# Altium PCB Arduino MEGA blank shield.pcbdoc
Units mil, origin at the board's own origin, x right, y up, seen from the top; angles counter-clockwise.
Board outline 3996.06 x 2106.3 mil, 2 copper layers (Top Layer, Bottom Layer), stack 62.8 mil thick; 29 components, 31 nets, 149 pads, 0 vias.
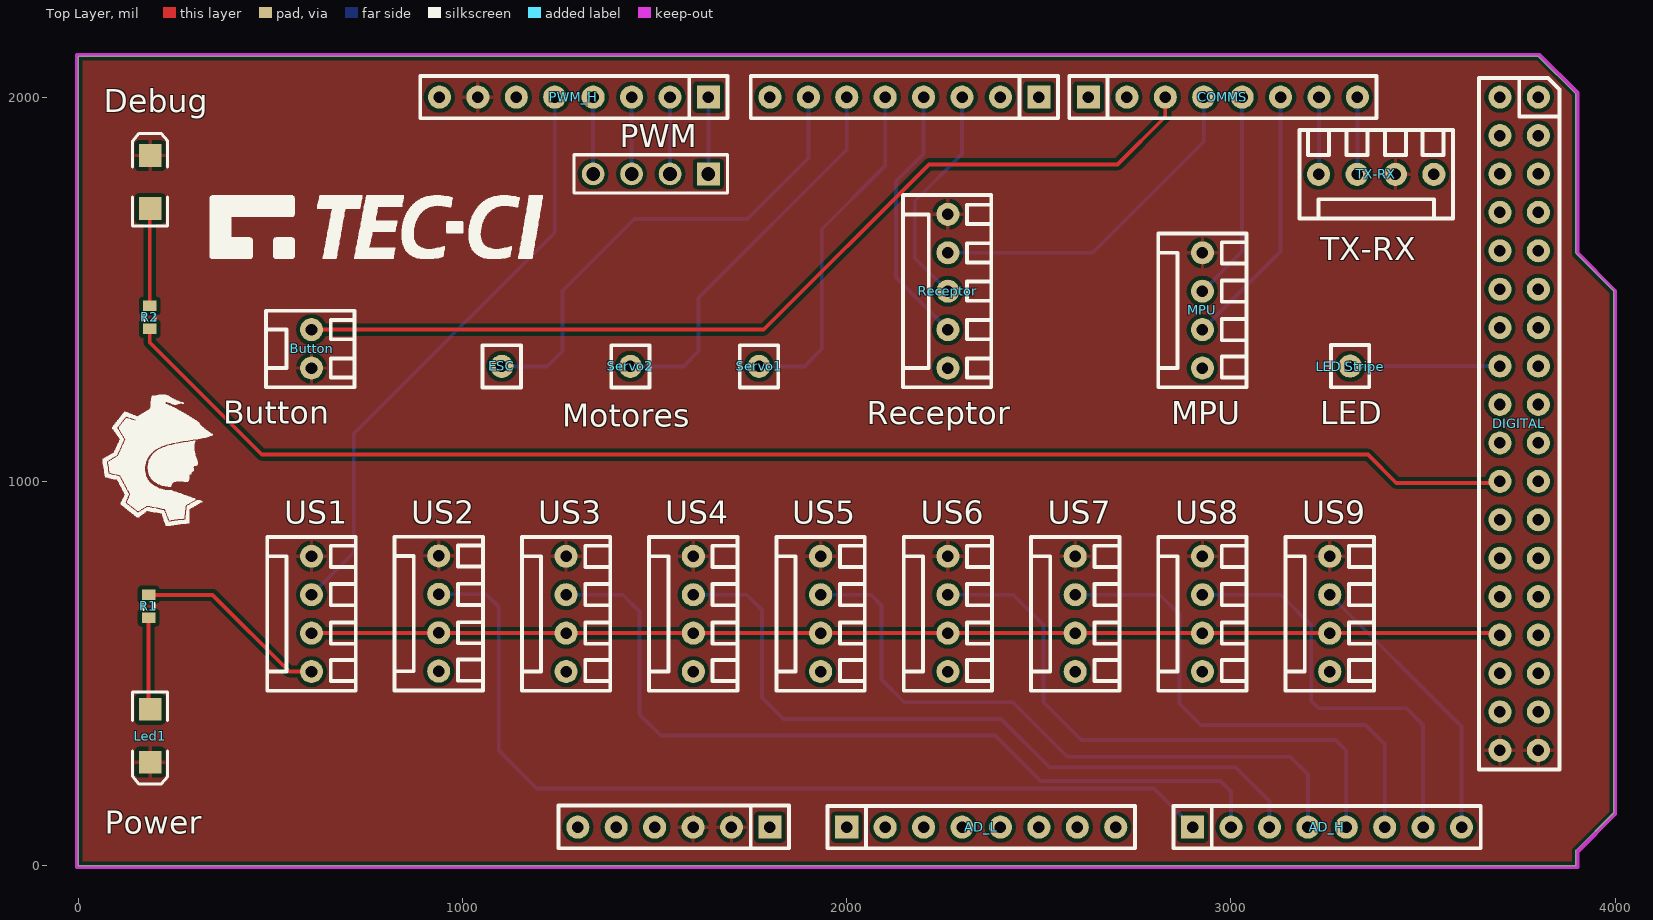
[diagram p0: Top Layer view]
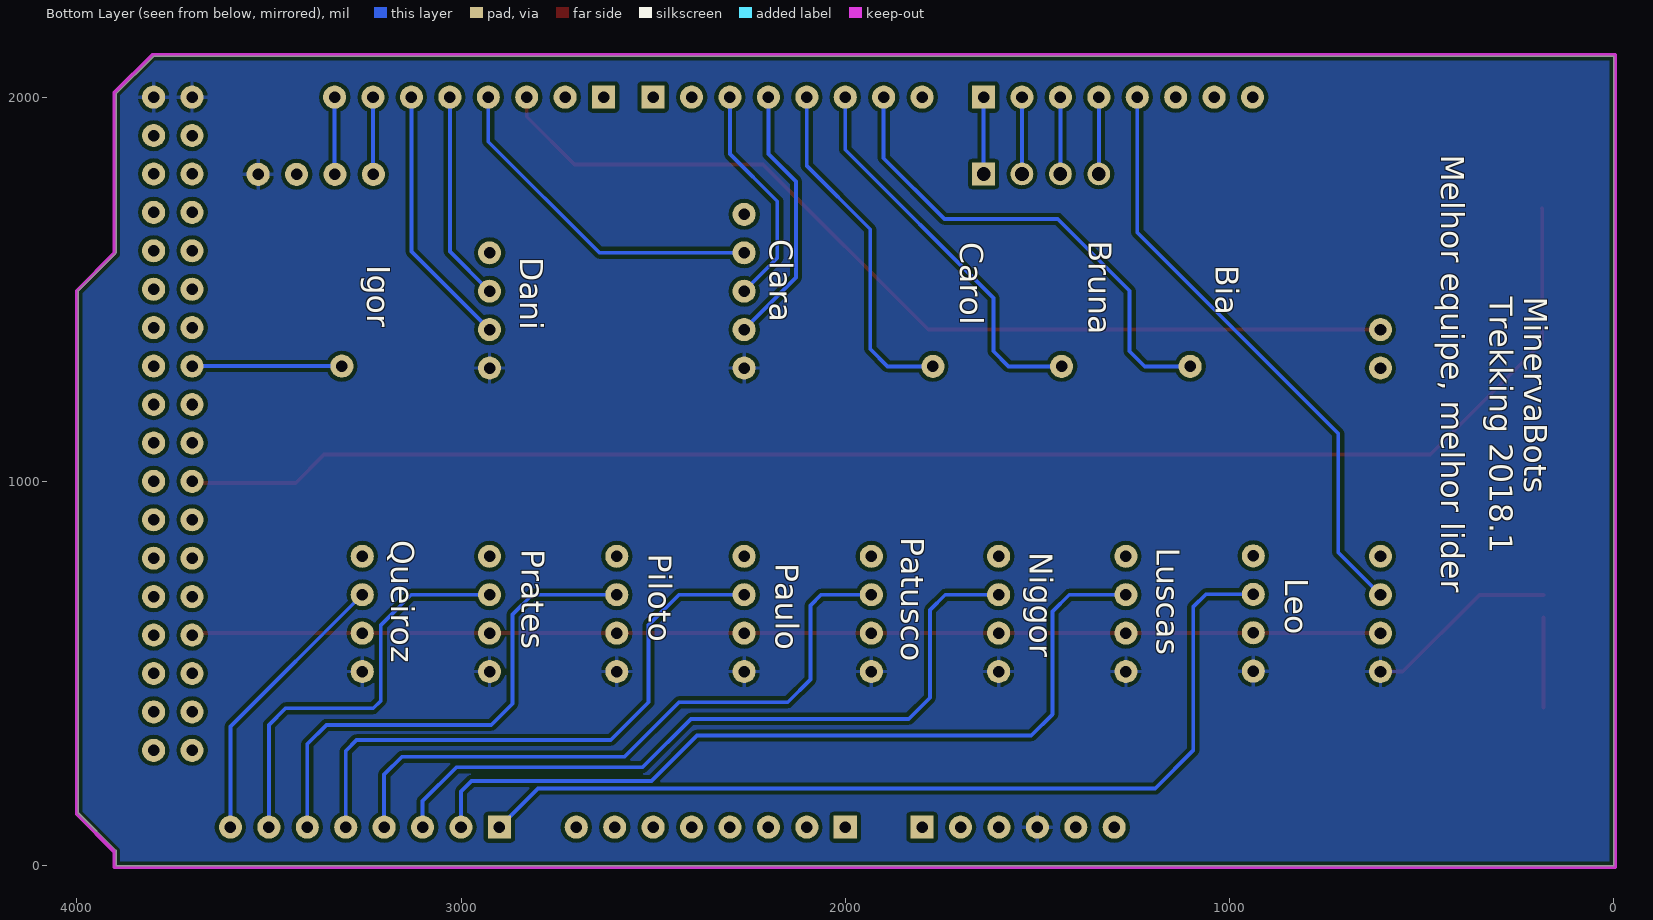
[diagram p1: Bottom Layer view, seen from below]

## Layer stack, top to bottom
Top Solder: solder mask 1, Solder Resist, Dk 3.5
Top Layer: signal copper 1.4
Dielectric1: dielectric 60, FR-4, Dk 4.8
Bottom Layer: signal copper 1.4
Bottom Solder: solder mask 1, Solder Resist, Dk 3.5

## Board outline
0,0 0,2106.3 3799.21,2106.3 3897.64,2007.87 3897.64,1594.49 3996.06,1496.06 3996.06,137.8 3897.64,39.37 3897.64,0

## Design rules (kind name [scope] priority, off if disabled: settings)
Clearance [All] p1: gap=10 ignorepadtopadclearanceinfootprint=FALSE except(0: Arc-Hole Track-Hole SMDPad-Hole THPad-Hole Via-Hole Fill-Hole Poly-Hole Region-Hole Text-Hole)
PolygonConnect [All] p1: connectstyle=Relief reliefconductorwidth=10 reliefentries=4 polygonreliefangle="90 Angle" airgapwidth=10
RoutingVias [All] p1: holewidth=28 width=50 viastyle="Through Hole" minholewidth=28 minwidth=50 maxholewidth=28 maxwidth=50
SilkToSolderMaskClearance SilkscreenOverComponentPads [IsPad] p1: minsilkscreentomaskgap=10 clearancetoexposedcopper=TRUE
SolderMaskExpansion [All] p1: expansion=4
Width [All] p1: maxlimit=10 minlimit=10 preferedwidth=10
29 further rules are at their usual default settings.

## Components (designator, comment, footprint, x,y, rotation, side; value= is the part's Value field where it differs from the comment)
AD_H "AD_H" "Header 8x1 8.5mm" 2900,100 r0 top locked
AD_L "AD_L" "Header 8x1 8.5mm" 2000,100 r0 top locked
Button "Botão" KK2 607,1294.88 r90 top
COMMS "Communication" "Header 8x1 8.5mm" 2629,2000 r0 top
Debug "LED debug" 3.2X1.6X1.1 187,1779 r90 top
DIGITAL "IO_36" "HEADER 36X 8MM" 3800,2000 r270 top locked
ESC "Locomotion ESC" "HEADER 1X1 8.5MM" 1102.36,1299.21 r0 top
Led1 "LED power" 3.2X1.6X1.1 187,338 r270 top
"LED Stripe" "*" "HEADER 1X1 8.5MM" 3310,1300 r0 top
Motores "PWM_L" "Header 8x1 8.5mm" 2500,2000 r180 top locked
MPU "MPU" KK4 2925.75,1294.88 r90 top
Power "POWER" "Header 6x1 8.5mm" 1800,100 r180 top locked (schematic designator POWER)
PWM "PWM" HDR1X4 1640,1800 r180 top
PWM_H "PWM_H" "Header 8x1 8.5mm" 1640,2000 r180 top locked
R1 "R1" J1-0603 183,675 r270 top value=330
R2 "R2" J1-0603 186,1427 r90 top value=330
Receptor "*" KK5 2263.25,1294.88 r90 top
Servo1 "Steering Servo Motor" "HEADER 1X1 8.5MM" 1771.65,1299.21 r0 top
Servo2 "Camera Servo Motor" "HEADER 1X1 8.5MM" 1437.01,1299.21 r0 top
TX-RX "TX-RX" KK4 3528,1799 r180 top
US1 "Ultrassom 1" KK4 607,505 r90 top
US2 "Ultrassom 2" KK4 938,506 r90 top
US3 "Ultrassom 3" KK4 1269.5,505 r90 top
US4 "Ultrassom 4" KK4 1600.75,505 r90 top
US5 "Ultrassom 5" KK4 1932,505 r90 top
US6 "Ultrassom 6" KK4 2263.25,505 r90 top
US7 "Ultrassom 7" KK4 2594.5,505 r90 top
US8 "Ultrassom 8" KK4 2925.75,505 r90 top
US9 "Ultrassom 9" KK4 3257,505 r90 top

## Footprints (in the part's own frame and the unit in brackets; to place one, negate y for a bottom-side part, rotate by r counter-clockwise, add the part's x,y. Pads: shape width x height; smd on the part's side, far side on the other; paste and mask are expansions set on the pad)
3.2X1.6X1.1 [mm] "SMT LED; 2 Flat Leads"
  rect 1.5x1.5 smd: 1(-1.75,0) 2(1.75,0)
  silkscreen extent -2.9,-1.15 3.2,1.15
HDR1X4 [mm] "Connector; Header; 4 Position"
  rect 1.5x1.5 hole 0.9: 1(0,0)
  round 1.5 hole 0.9: 2(2.54,0) 3(5.08,0) 4(7.62,0)
  silkscreen extent -1.27,-1.27 8.89,1.27
"HEADER 1X1 8.5MM" [mil] "Stackable 1 pin header"
  round 60 hole 30: 1(0,0)
  silkscreen extent -50,-55 50,55, body extent -50,-57 50,57, height 335
"Header 6x1 8.5mm" [mil] "Stackable 6 pin header"
  rect 60x60 hole 30: 1(0,0)
  round 60 hole 30: 2(100,0) 3(200,0) 4(300,0) 5(400,0) 6(500,0)
  silkscreen extent -50,-56 550,55, body extent -50,-57 550,57, height 128
"Header 8x1 8.5mm" [mil] "Stackable 8 pin header"
  rect 60x60 hole 30: 1(0,0)
  round 60 hole 30: 2(100,0) 3(200,0) 4(300,0) 5(400,0) 6(500,0) 7(600,0) 8(700,0)
  silkscreen extent -50,-55 750,55, body extent -49,-58 750,57, height 128
"HEADER 36X 8MM" [mil] "Stackable 10 pin header"
  round 60 hole 30: 1(0,0) 2(0,-100) 3(100,0) 4(100,-100) 5(200,0) 6(200,-100) 7(300,0) 8(300,-100) 9(400,0) 10(400,-100) 11(500,0) 12(500,-100) 13(600,0) 14(600,-100) 15(700,0) 16(700,-100) 17(800,0) 18(800,-100) 19(900,-100) 20(900,0) 21(1000,0) 22(1000,-100) 23(1100,0) 24(1100,-100) 25(1200,0) 26(1200,-100) 27(1300,0) 28(1300,-100) 29(1400,0) 30(1400,-100) 31(1500,0) 32(1500,-100) 33(1600,0) 34(1600,-100) 35(1700,0) 36(1700,-100)
  silkscreen extent -50,-155 1750,55, body extent -50,-157 1750,57, height 128
J1-0603 [mm] "Chip Resistor, Body 1.6x0.8mm, IPC High Density"
  rect 0.7x0.9 smd: 1(-0.75,0) 2(0.75,0)
  silkscreen extent -0.2,-0.35 0.2,0.35, body extent -0.85,-0.48 0.85,0.48, height 0.9
KK2 [mil] "KK Conector, 2 ways"
  round 60 hole 30: 1(0,0) 2(100,0)
  silkscreen extent -50,-112 149,118, body extent -50,-116 150,114, height 468
KK4 [mil] "KK Conector, 4 ways"
  round 60 hole 30: 1(0,0) 2(100,0) 3(200,0) 4(300,0)
  silkscreen extent -50,-115 350,115, body extent -50,-117 350,113, height 468
KK5 [mil] "KK Conector, 5 ways"
  round 60 hole 30: 1(0,0) 2(100,0) 3(200,0) 4(300,0) 5(400,0)
  silkscreen extent -50,-113 450,117, body extent -50,-117 450,113, height 468

## Part data
AD_H AD_L COMMS Motores PWM_H: Supplier Part Number 1=2698925, Supplier 1=Arrow
  AD_H: Supplier 2=Digi-Key, Supplier 3=Newark, Supplier 4=Arrow, Supplier Part Number 2=SAM1198-08-ND, Supplier Part Number 3=11P8329, Supplier Part Number 4=2698940
  AD_L: Supplier 2=Arrow, Supplier 3=Newark, Supplier 4=Digi-Key, Supplier Part Number 2=2698940, Supplier Part Number 3=11P8329, Supplier Part Number 4=SAM1198-08-ND
  COMMS: Supplier 2=Digi-Key, Supplier 3=Arrow, Supplier Part Number 2=SAM1198-08-ND, Supplier Part Number 3=2698940
  Motores PWM_H: Supplier 2=Arrow, Supplier 3=Digi-Key, Supplier Part Number 2=2698940, Supplier Part Number 3=SAM1198-08-ND
Button: library part KK2, "KK Connector, 2 ways"
Debug Led1: library part LED2, "Typical RED, GREEN, YELLOW, AMBER GaAs LED", LatestRevisionDate=17-Jul-2002, LatestRevisionNote="Re-released for DXP Platform.", PackageDescription="SM LED; 2 Flat Leads", PackageReference=3.2X1.6X1.1, PackageVersion=Feb-2002, Published=8-Jun-2000, Publisher="Altium Limited"
DIGITAL: Supplier Part Number 1=2697470, Supplier 1=Arrow, Supplier 2=Digi-Key, Supplier 3=Arrow, Supplier Part Number 2=SAM1198-36-ND, Supplier Part Number 3=2697486
ESC "LED Stripe" Servo1 Servo2: library part "Male Pin Head 1x1"
MPU US1 US2 US3 US4 US5 US6 US7 US8 US9: library part KK4, "KK Connector, 4 ways"
Power: Supplier Part Number 1=2699075, Supplier 1=Arrow, Supplier 2=Arrow, Supplier 3=Newark, Supplier 4=Digi-Key, Supplier Part Number 2=2699089, Supplier Part Number 3=11P8269, Supplier Part Number 4=SAM1198-06-ND
PWM: library part "Header 4", "Header, 4-Pin", LatestRevisionDate=17-Jul-2002, LatestRevisionNote="Re-released for DXP Platform.", Publisher="Altium Limited"
R1 R2: library part Res3, "Resistor", LatestRevisionDate=29-May-2009, LatestRevisionNote="IPC-7351 Footprint Added.", PackageDescription="Chip Resistor", PackageReference=J1-0603, Published=8-Jun-2000, Publisher="Altium Limited"
Receptor: library part KK5, "KK Connector, 5 ways"
TX-RX: library part Component_1, "KK Connector, 4 ways"

## Nets (pads, with @x,y where several pads share a name; then routed paths per layer and width w, separated by ;. In a path a pad name is that pad's centre, name@x,y a point inside that pad or via, vN(x,y) a via of type N, cw(c..) or ccw(c..) an arc to the next point about the centre after c; other vN are vias at no path point)
5V: DIGITAL.1 DIGITAL.2 MPU.1 Power.4 R1.1 Receptor.1 TX-RX.1 US1.1 US2.1 US3.1 US4.1 US5.1 US6.1 US7.1 US8.1 US9.1 | length 506.6
  Top Layer w10: R1.1 349.47,704.53 549,505 US1.1
AD8: AD_H.1 US2.3 | length 2432.1
  Bottom Layer w10: US2.3 1061.72,706 1094.49,673.23 1094.49,299.21 1193.23,200.47 2799.53,200.47 AD_H.1
AD9: AD_H.2 US3.3 | length 2192.4
  Bottom Layer w10: US3.3 1417.05,705 1460.63,661.42 1460.63,393.7 1515.75,338.58 2385.83,338.58 2503.94,220.47 2972.44,220.47 3000,192.91 AD_H.2
AD10: AD_H.3 US4.3 | length 1930.3
  Bottom Layer w10: US4.3@1579,703 US4.3@1584,698 ; US4.3 1739.88,705 1779.53,665.35 1779.53,437.01 1834.65,381.89 2401.57,381.89 2527.56,255.91 3011.81,255.91 3100,167.72 AD_H.3
AD11: AD_H.4 US5.3 | length 1711.9
  Bottom Layer w10: US5.3 2062.72,705 2090.55,677.17 2090.55,484.25 2149.61,425.2 2433.07,425.2 2574.8,283.46 3153.54,283.46 3200,237.01 AD_H.4
AD12: AD_H.5 US6.3 | length 1521.2
  Bottom Layer w10: US6.3 2432.8,705 2511.81,625.98 2511.81,425.2 2610.24,326.77 3271.65,326.77 3300,298.43 AD_H.5
AD13: AD_H.6 US7.3 | length 1319
  Bottom Layer w10: US7.3 2814.68,705 2866.14,653.54 2866.14,421.26 2921.26,366.14 3350.39,366.14 3400,316.54 AD_H.6
AD14: AD_H.7 US8.3 | length 1096.1
  Bottom Layer w10: US8.3 3129.65,705 3208.66,625.98 3208.66,429.13 3228.35,409.45 3456.69,409.45 3500,366.14 AD_H.7
AD15: AD_H.8 US9.3 | length 747.1
  Bottom Layer w10: US9.3 3600,362 AD_H.8
GND: Button.1 Debug.2 DIGITAL.35 DIGITAL.36 Led1.2 MPU.4 Power.2 Power.3 PWM_H.7 Receptor.5 TX-RX.2 US1.4 US2.4 US3.4 US4.4 US5.4 US6.4 US7.4 US8.4 US9.4
IO35: "LED Stripe.1" DIGITAL.16 | length 390
  Bottom Layer w10: 3310,1300 DIGITAL.16
IO41: DIGITAL.22 R2.1 | length 3703.3
  Top Layer w10: R2.1 186,1361 477.53,1069.47 3356.53,1069.47 3430,996 3696,996 DIGITAL.22
IO49: DIGITAL.30 US1.2 US2.2 US3.2 US4.2 US5.2 US6.2 US7.2 US8.2 US9.2 | length 3095.1
  Top Layer w10: US1.2 US3.2 US4.2 US5.2 US6.2 US7.2 US8.2 US9.2 3695,605 DIGITAL.30
NetDebug_1: Debug.1 R2.2 | length 254
  Top Layer w10: R2.2 186,1709.1 Debug.1
NetLed1_1: Led1.1 R1.2 | length 234.6
  Top Layer w10: Led1.1@183,410.9 R1.2
PWM2: Motores.3 Receptor.3 | length 591.8
  Bottom Layer w10: Receptor.3 2177,1581.13 2177,1729 2300,1852 Motores.3
PWM3: Motores.4 Receptor.2 | length 691
  Bottom Layer w10: Motores.4 2200,1852 2128,1780 2128,1530.13 Receptor.2
PWM4: Motores.5 Servo1.1 | length 906
  Bottom Layer w10: Servo1.1 1889.76,1299.21 1935,1344.45 1935,1656 2100,1821 Motores.5
PWM5: Motores.6 Servo2.1 | length 1014.7
  Bottom Layer w10: Servo2.1 1574.8,1299.21 1614.17,1338.58 1614.17,1477.17 2000,1863 Motores.6
PWM6: ESC.1 Motores.7 | length 1280.4
  Bottom Layer w10: ESC.1 1220.47,1299.21 1259.84,1338.58 1259.84,1496.06 1446.78,1683 1742,1683 1900,1841 Motores.7 Motores.7@1895,1995
PWM8: PWM.1 PWM_H.1 | length 200
  Bottom Layer w10: PWM.1 PWM_H.1
PWM9: PWM.2 PWM_H.2 | length 200
  Bottom Layer w10: PWM.2 PWM_H.2
PWM10: PWM.3 PWM_H.3 | length 200
  Bottom Layer w10: PWM.3 PWM_H.3
PWM11: PWM.4 PWM_H.4 | length 200
  Bottom Layer w10: PWM.4 PWM_H.4
PWM12: PWM_H.5 US1.3 | length 1557.2
  Bottom Layer w10: US1.3 717,815 717,1125 1240,1648 PWM_H.5
RX1: Button.2 COMMS.3 | length 2502.5
  Top Layer w10: Button.2 1783.88,1394.88 2214,1825 2705,1825 2829,1949 COMMS.3
RX2: COMMS.5 MPU.3 | length 547.9
  Bottom Layer w10: MPU.3 3029,1598.13 COMMS.5
RX3: COMMS.7 TX-RX.4 | length 200
  Bottom Layer w10: TX-RX.4@3229,1800 COMMS.7
TX1: COMMS.4 Receptor.4 | length 901.5
  Bottom Layer w10: Receptor.4 2639.88,1594.88 2929,1884 COMMS.4
TX2: COMMS.6 MPU.2 | length 689.3
  Bottom Layer w10: MPU.2 3129,1598.13 COMMS.6
TX3: COMMS.8 TX-RX.3 | length 200
  Bottom Layer w10: TX-RX.3@3329,1800 COMMS.8
pads on no net: AD_L.1 AD_L.2 AD_L.3 AD_L.4 AD_L.5 AD_L.6 AD_L.7 AD_L.8 COMMS.1 COMMS.2 DIGITAL.3 DIGITAL.4 DIGITAL.5 DIGITAL.6 DIGITAL.7 DIGITAL.8 DIGITAL.9 DIGITAL.10 DIGITAL.11 DIGITAL.12 DIGITAL.13 DIGITAL.14 DIGITAL.15 DIGITAL.17 DIGITAL.18 DIGITAL.19 DIGITAL.20 DIGITAL.21 DIGITAL.23 DIGITAL.24 DIGITAL.25 DIGITAL.26 DIGITAL.27 DIGITAL.28 DIGITAL.29 DIGITAL.31 DIGITAL.32 DIGITAL.33 DIGITAL.34 Motores.1 Motores.2 Motores.8 Power.1 Power.5 Power.6 PWM_H.6 PWM_H.8

## Polygon pours and split planes (outlines as drawn)
GND on Top Layer "Top Layer- GND" (solid, remove dead copper, pour order 6): -326.77,2381.89 4685.04,2381.89 4685.04,1767.72 4685.04,1496.06 4685.04,-318.9 -318.9,-318.9 -326.77,-62.99
5V on Bottom Layer "Bottom Layer-5V" (solid, remove dead copper, pour order 10): -169.29,2240.16 -169.29,-161.42 4145.67,-161.42 4145.67,2232.28

## Keep-outs
Keep-Out Layer:
  lines w10: -3.94,-3.94 -3.94,2110.24 3803.15,2110.24 3901.57,2011.81 3901.57,1594.49 4000,1496.06 4000,133.86 3901.57,35.43 3901.57,-3.94 -3.94,-3.94

## Silkscreen, mask and mechanical layers (free items; w line width, h text height)
Top Overlay:
  drawing of 1965 lines, arcs and shapes, not listed
  text "TX-RX" at 3232.28,1574.8 h60
  text "Button" at 377.95,1149.61 h60
  text "Receptor" at 2052,1149 h60
  text "MPU" at 2844,1149 h60
  text "LED" at 3232,1149 h60
Bottom Overlay:
  text "Melhor equipe, melhor lider" at 448.82,1850.39 h60 r90
  text "Clara" at 2196.85,1629.92 h60 r90
  text "Bruna" at 1366.14,1625.98 h60 r90
  text "Carol" at 1700.79,1622.05 h60 r90
  text "Dani" at 2846.46,1582.68 h60 r90
  text "Bia" at 1035.43,1562.99 h60 r90
  text "Igor" at 3244.09,1562.99 h60 r90
  text "MinervaBots / Trekking 2018.1" at 322.83,1480.32 h60 r90
  text "Patusco" at 1854.33,854.33 h60 r90
  text "Queiroz" at 3181.1,846.46 h60 r90
  text "Luscas" at 1188.98,826.77 h60 r90
  text "Prates" at 2842.52,822.83 h60 r90
  text "Niggor" at 1519.68,814.96 h60 r90
  text "Piloto" at 2511.81,811.02 h60 r90
  text "Paulo" at 2181.1,787.4 h60 r90
  text "Leo" at 854.33,748.03 h60 r90